# Altium PCB boost.PcbDoc
Units mm, origin at the board's own origin, x right, y up, seen from the top; angles counter-clockwise.
Board outline 50.04 x 50.04 mm, 2 copper layers (Top Layer, Bottom Layer); 27 components, 16 nets, 93 pads, 88 vias.
Unrouted connection lines stored in the file: 1.
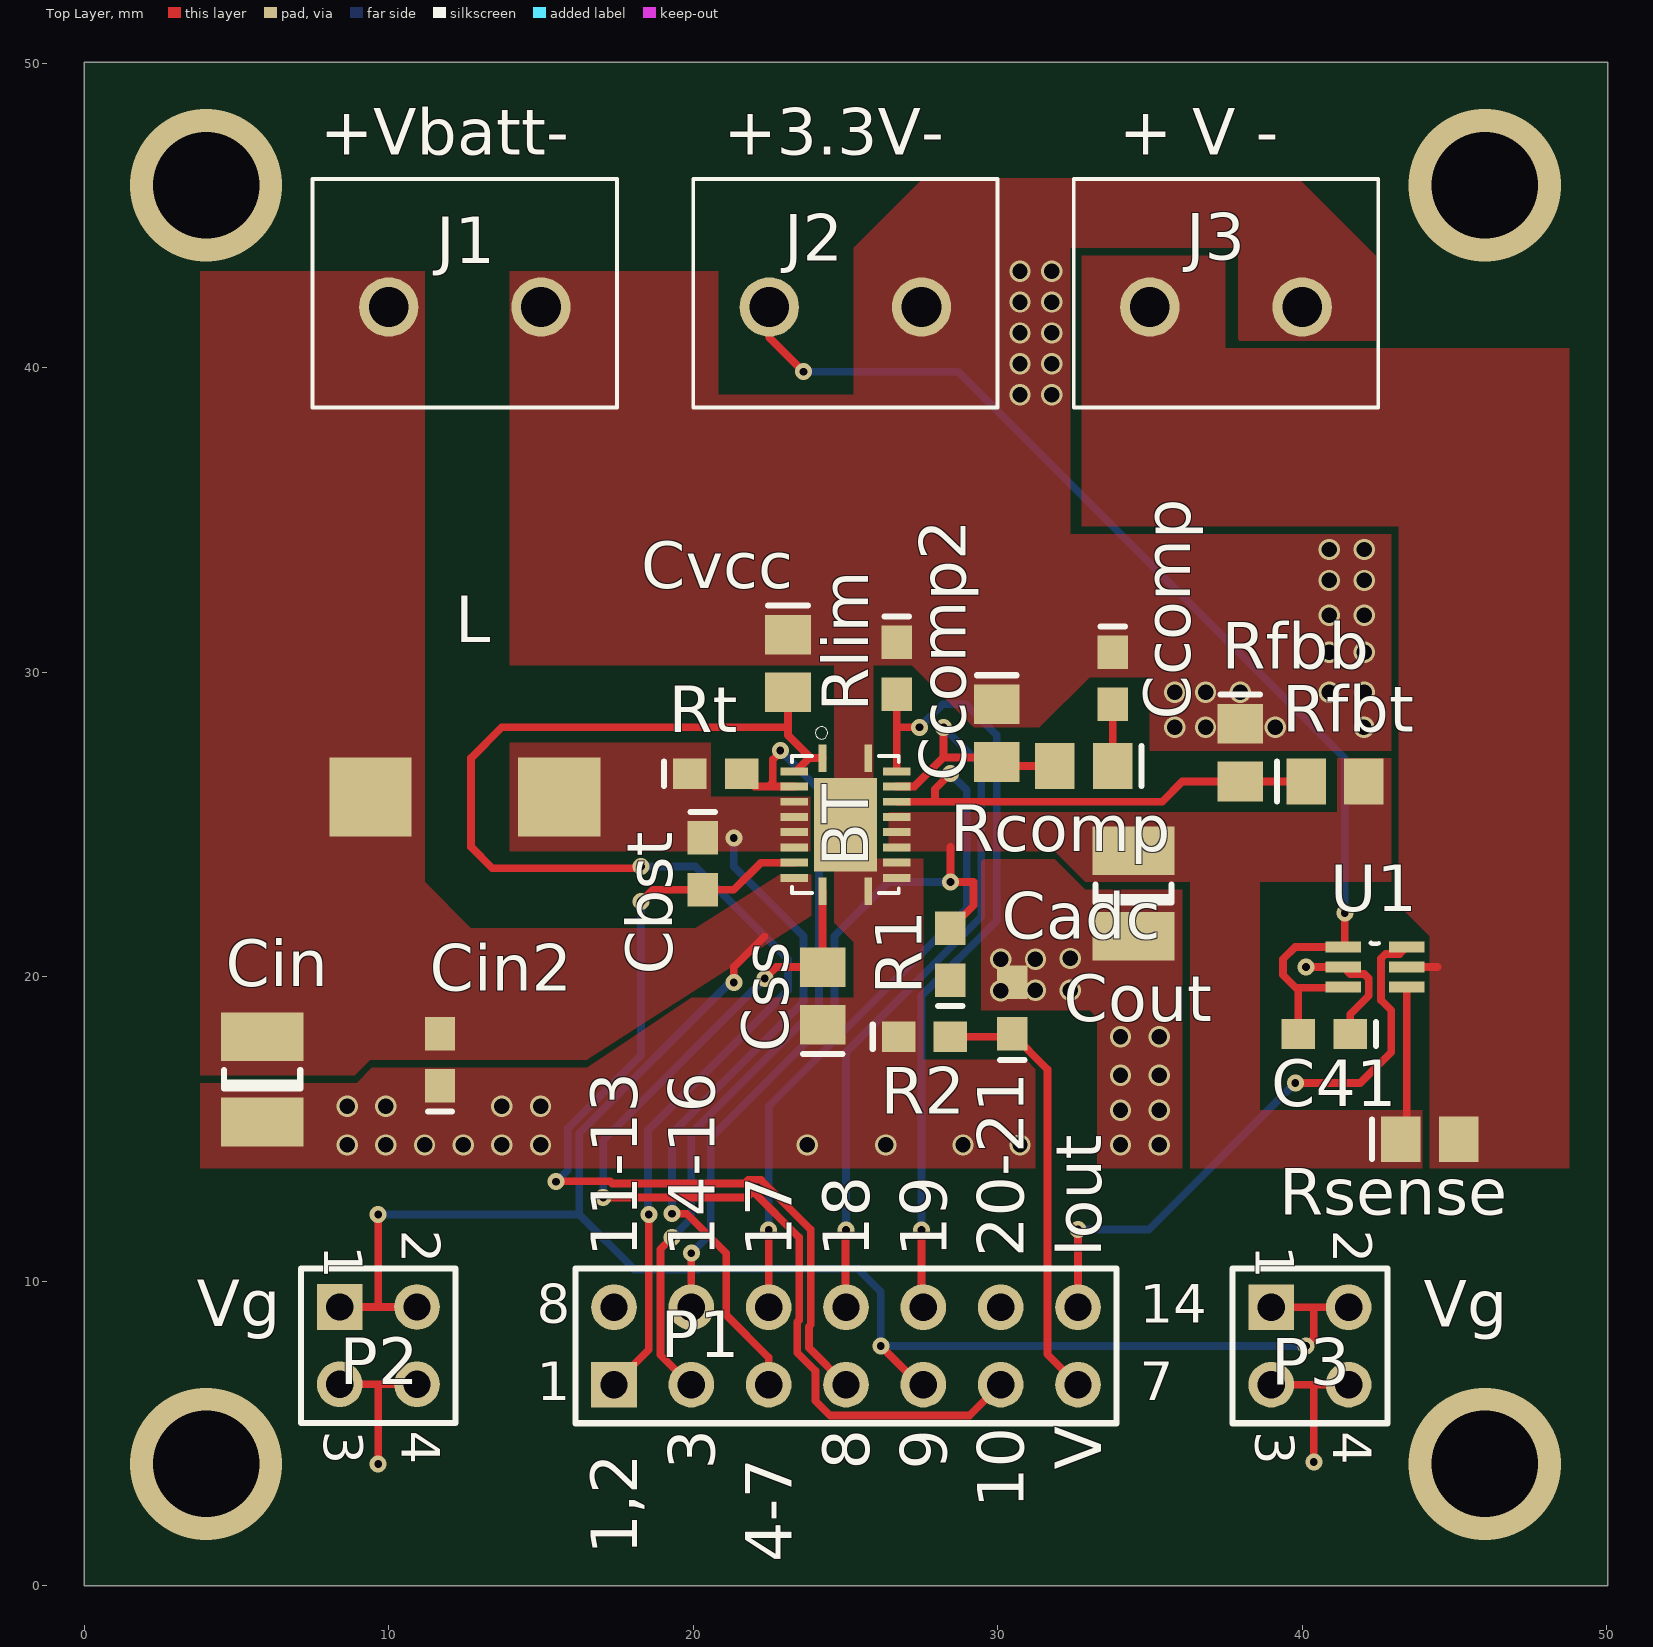
[diagram p0: Top Layer view]
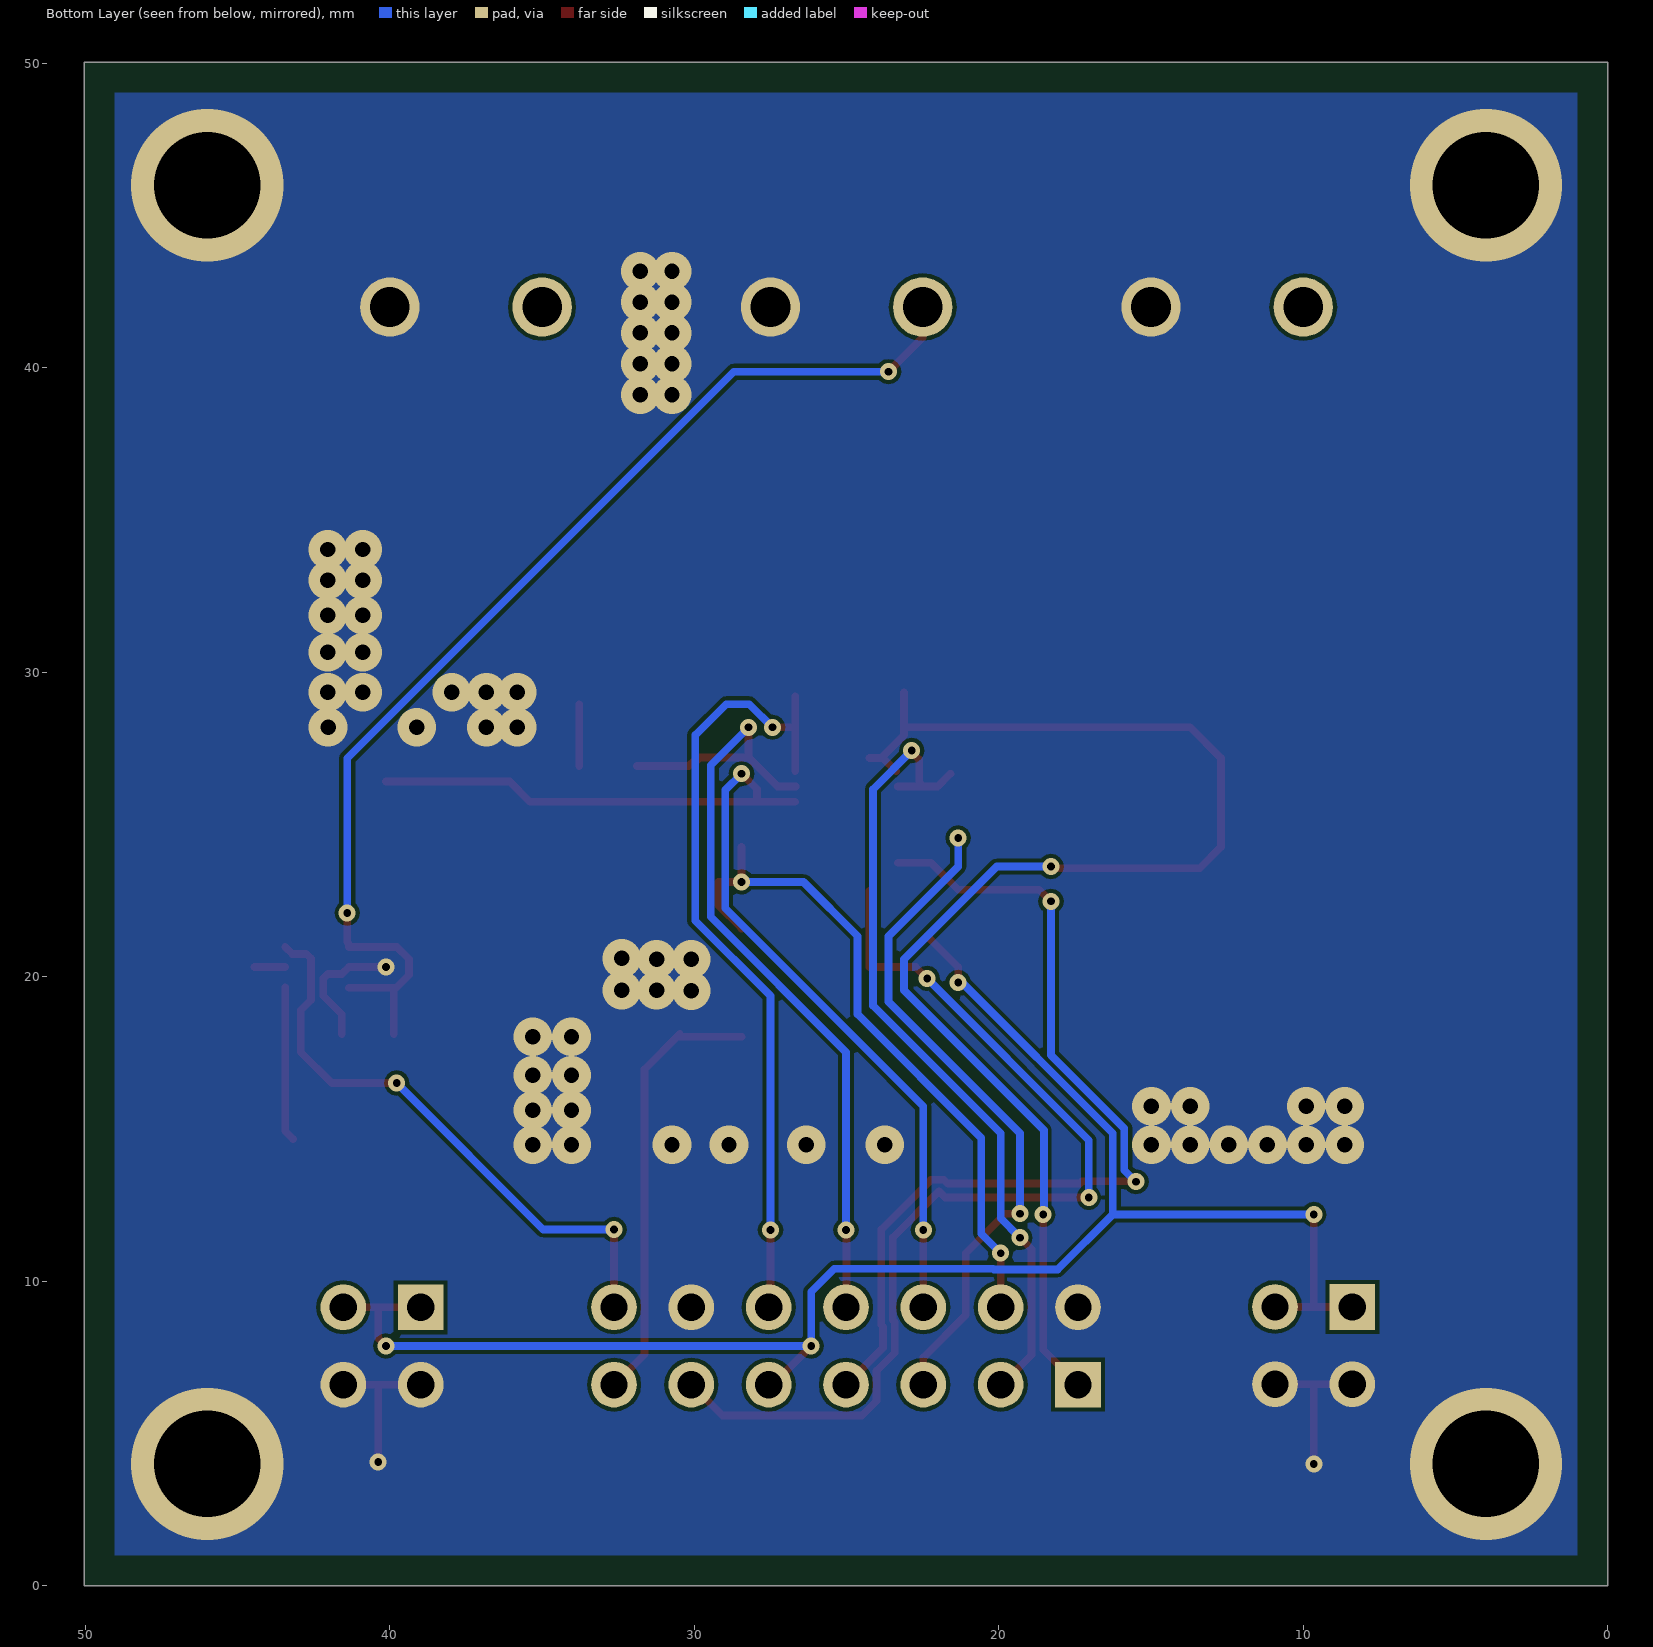
[diagram p1: Bottom Layer view, seen from below]

## Layer stack, top to bottom
Top Solder: solder mask 0.0102, Solder Resist, Dk 3.5
Top Layer: signal copper 0.0356
Dielectric 1: dielectric 0.32, FR-4, Dk 4.8
Bottom Layer: signal copper 0.0356
Bottom Solder: solder mask 0.0102, Solder Resist, Dk 3.5

## Board outline
0,0 0,50.038 50.038,50.038 50.038,0

## Design rules (kind name [scope] priority, off if disabled: settings)
AssemblyTestPointUsage [All] p1 off:
AssemblyTestpoint [All] p1 off: testpointundercomponent=TRUE minsize=1.016 maxsize=2.54 preferedsize=1.524 minholesize=0 maxholesize=1.016 preferedholesize=0.813 testpointgrid=0.025 usegrid=TRUE gridtolerance=0 allowsidetop=TRUE allowsidebottom=TRUE
Clearance [All] p1: gap=0.127 ignorepadtopadclearanceinfootprint=FALSE except(0: Arc-Hole Track-Hole SMDPad-Hole THPad-Hole Via-Hole Fill-Hole Poly-Hole Region-Hole Text-Hole)
FabricationTestPointUsage [All] p1 off: valid=0 allowmultiple=FALSE
FabricationTestpoint [All] p1 off: side=3 testpointundercomponent=FALSE minsize=1.016 maxsize=2.54 preferedsize=1.524 minholesize=0 maxholesize=1.016 preferedholesize=0.813 testpointgrid=0.025 allowsidetop=TRUE allowsidebottom=TRUE usegrid=TRUE gridtolerance=0
HoleSize [All] p1: absolutevalues=TRUE maxlimit=6.35 minlimit=0.203 maxpercent=80.000 minpercent=20.000
MinimumAnnularRing [All] p1: minimumring=0.127
MinimumSolderMaskSliver [All] p1: minsoldermaskwidth=0.102
PlaneConnect [All] p1: planeconnectstyle=Direct reliefexpansion=0.508 reliefentries=4 reliefconductorwidth=0.254 reliefairgap=0.254
PolygonConnect [All] p1: connectstyle=Direct reliefconductorwidth=0.254 reliefentries=4 polygonreliefangle="90 Angle" airgapwidth=0.254
RoutingVias [All] p1: holewidth=0.254 width=0.559 viastyle="Through Hole" minholewidth=0.254 minwidth=0.559 maxholewidth=12.7 maxwidth=12.7
SilkToSilkClearance [All] p1: silktosilkclearance=0
SilkToSolderMaskClearance [IsPad] p1: minsilkscreentomaskgap=0.076 clearancetoexposedcopper=TRUE
SolderMaskExpansion [All] p1: expansion=0.102
Width "Schematic Width Constraint" [InNet('Vout')] p1: maxlimit=2 minlimit=0.254 preferedwidth=2 minimp=50.000000 maximp=50.000000 favimp=50.000000
Width [All] p2: maxlimit=254 minlimit=0.152 preferedwidth=0.254
21 further rules are at their usual default settings.

## Classes and differential pairs
net class "5A Trace": Vadc

## Components (designator, comment, footprint, x,y, rotation, side; value= is the part's Value field where it differs from the comment)
BT "TPS61088" QFN50P450X350X100-21N 25,25 r0 top
C41 "Cap Semi" 0603 40.728,18.122 r180 top value=0.1uF
Cadc "" 0603 30.48,18.972 r90 top value=0.1µF
Cbst "" 0603 20.32,23.71 r270 top value=100nF
Ccomp "" 0603 33.782,29.806 r270 top value=470pF
Ccomp2 "" 0805 29.972,28.006 r270 top value=22pF
Cin "" 1210 5.842,16.634 r90 top value=47µF
Cin2 "" 0603 11.684,17.272 r90 top value=100nF
Cout "" 1210 34.462,22.736 r90 top value=100µF
Css "8.2nF" 0805 24.25,19.37 r90 top
Cvcc "" 0805 23.114,30.292 r270 top value=2.2µF
J1 "691102710002" 691102710002 12.5,42 r0 top
J2 "691102710002" 691102710002 25,42 r0 top
J3 "691102710002" 691102710002 37.5,42 r0 top
L "" 2-SMD 12.498,25.908 r0 top value=600nH
P1 "Header 7X2A" HDR2X7_CEN 17.399,6.604 r0 top
P2 "Header 2X2" HDR2X2 8.387,9.155 r270 top
P3 "Header 2X2" HDR2X2 38.989,9.144 r270 top
R1 "" 0603 28.448,20.74 r90 top value=100kO
R2 "" 0603 27.598,18.034 r0 top value=100kO
Rcomp "" 0805 32.832,26.924 r180 top value=44.2kO
Rfbb "" 0805 37.973,27.366 r270 top value=69.8kO
Rfbt "" 0805 41.082,26.416 r0 top value=220kO
Rlim "" 0603 26.685,30.138 r270 top value=105kO
Rsense "10mΩ 1/2W 0805" 0805 44.196,14.668 r0 top value=10mO
Rt "RtA1" 0603 20.74,26.67 r0 top value=267kO
U1 "INA214" SOT65P210X110-6N 42.393,20.32 r0 top

## Footprints (in the part's own frame and the unit in brackets; to place one, negate y for a bottom-side part, rotate by r counter-clockwise, add the part's x,y. Pads: shape width x height; smd on the part's side, far side on the other; paste and mask are expansions set on the pad)
2-SMD [mm]
  rect 2.7x2.6 smd: 1(-3.1,0) 2(3.1,0)
0603 [mm] "Chip Capacitor; Body 1.6 x 0.8 mm (LxW typ)"
  rect 1.1x1 smd: 1(-0.85,0) 2(0.85,0)
  silkscreen extent -1.7,-0.4 -1.7,0.4
0805 [mm] "Chip Capacitor; Body 2.0 x 1.2 mm (LxW typ)"
  rect 1.3x1.5 smd: 1(-0.95,0) 2(0.95,0)
  silkscreen extent -1.9,-0.65 -1.9,0.65
1210 [mm] "Chip Capacitor; Body 3.2 x 2.5 mm (LxW typ)"
  rect 1.6x2.7 smd: 1(-1.4,0) 2(1.4,0)
  silkscreen extent -0.3,-1.25 0.3,1.25
691102710002 [mm]
  round 1.95 hole 1.3: 1(-2.5,0) 2(2.5,0)
  silkscreen extent -5,-3.3 5,4.2
HDR2X2 [mm] "Connector; Header; 2x2 Position"
  rect 1.5x1.5 hole 0.9: 1(0,0)
  round 1.5 hole 0.9: 2(0,2.54) 3(2.54,0) 4(2.54,2.54)
  silkscreen extent -1.27,-1.27 3.81,3.81
HDR2X7_CEN [mm] "Connector; Header; 7x2 Position"
  rect 1.5x1.5 hole 0.9: 1(0,0)
  round 1.5 hole 0.9: 2(2.54,0) 3(5.08,0) 4(7.62,0) 5(10.16,0) 6(12.7,0) 7(15.24,0) 8(0,2.54) 9(2.54,2.54) 10(5.08,2.54) 11(7.62,2.54) 12(10.16,2.54) 13(12.7,2.54) 14(15.24,2.54)
  silkscreen extent -1.27,-1.27 16.51,3.81
QFN50P450X350X100-21N [mm]
  rect 0.26x0.9 smd: 1(-0.75,2.185) 10(-0.75,-2.185) 11(0.75,-2.185) 20(0.75,2.185)
  rect 0.9x0.26 smd: 2(-1.685,1.75) 3(-1.685,1.25) 4(-1.685,0.75) 5(-1.685,0.25) 6(-1.685,-0.25) 7(-1.685,-0.75) 8(-1.685,-1.25) 9(-1.685,-1.75) 12(1.685,-1.75) 13(1.685,-1.25) 14(1.685,-0.75) 15(1.685,-0.25) 16(1.685,0.25) 17(1.685,0.75) 18(1.685,1.25) 19(1.685,1.75)
  rect 2.07x3.07 smd: 21(0,0)
  silkscreen extent -1.75,-2.25 1.75,3.21
SOT65P210X110-6N [mil]
  rect 46x14 smd: 1(-41,26) 2(-41,0) 3(-41,-26) 4(41,-26) 5(41,0) 6(41,26)
  silkscreen extent -5,30 5,31

## Part data
BT: "Boost converter"
C41: "Capacitor (Semiconductor SIM Model)", LatestRevisionDate=29-May-2009, LatestRevisionNote="IPC-7351 Footprint Added.", PackageDescription="Chip Capacitor", PackageReference=C1206, Published=8-Jun-2000, Publisher="Altium Limited"
Cadc Cbst Ccomp Ccomp2 Cin Cin2 Cout Css Cvcc: library part Cap, "Capacitor", LatestRevisionDate=17-Jul-2002, LatestRevisionNote="Re-released for DXP Platform.", PackageDescription="Radial Cap, Thru-Hole; 2 Leads; 0.3 in Pin Spacing", PackageReference=RAD-0.3, Published=8-Jun-2000, Publisher="Altium Limited"
J1 J2 J3: "102 Series 5mm Pitch Straight, PCB Terminal Block, Through Hole, 2 Way", Package=None, Availability=Unavailable, MF="Wurth Electronics", MP=691102710002, Price=None, SnapEDA_Link=https://www.snapeda.com/parts/691102710002/Wurth%20Electronics%20Inc/view-part/?ref=snap
L: library part Inductor, "Inductor", Code_IEC=1005, Code_JEITA=0402, LatestRevisionDate=29-May-2009, LatestRevisionNote="IPC-7351 Footprint Added.", PackageDescription="Chip Inductor", PackageReference=0402-A, Published=8-Jun-2000, Publisher="Altium Limited"
P1: "Header, 7-Pin, Dual row", LatestRevisionDate=17-Jul-2002, LatestRevisionNote="Re-released for DXP Platform.", Publisher="Altium Limited"
P2 P3: "Header, 2-Pin, Dual row", LatestRevisionDate=17-Jul-2002, LatestRevisionNote="Re-released for DXP Platform.", Publisher="Altium Limited"
R1 R2 Rcomp Rfbb Rfbt Rlim Rsense Rt: library part Res2, "Resistor", LatestRevisionDate=17-Jul-2002, LatestRevisionNote="Re-released for DXP Platform.", PackageDescription="Axial Device, Thru-Hole; 2 Leads; 0.4 in Pin Spacing", PackageReference=AXIAL-0.4, Published=8-Jun-2000, Publisher="Altium Limited"
U1: "Current monitor", Supplier Part Number 1=296-38956-6-ND, Supplier 1=Digi-Key

## Via types
v1: diameter 0.7/1.27 (per signal layer), hole 0.508, Top Layer to Bottom Layer, 55 vias
v2: diameter 0.559, hole 0.254, Top Layer to Bottom Layer, 29 vias
v3: diameter 5/5 (per signal layer), hole 3.5, Top Layer to Bottom Layer, 4 vias

## Nets (pads, with @x,y where several pads share a name; then routed paths per layer and width w, separated by ;. In a path a pad name is that pad's centre, name@x,y a point inside that pad or via, vN(x,y) a via of type N, cw(c..) or ccw(c..) an arc to the next point about the centre after c; other vN are vias at no path point)
+3V3: C41.2 J2.1 U1.1 U1.3 | length 38.1
  Top Layer w0.254: J2.1 22.5,41 v2(23.622,39.878) ; C41.2 39.878,19.558 39.796,19.64 ; U1.3@41.351,19.64 39.796,19.64 ; U1.1 39.776,20.98 39.37,20.574 39.37,20.066 39.796,19.64 ; U1.1@41.351,21.082 41.402,21.133 v2(41.402,22.098)
  Bottom Layer w0.254: v2(23.622,39.878) 28.702,39.878 41.402,27.178 v2(41.402,22.098)
+5V: J3.1 Rsense.2 U1.5 | length 1
  Top Layer w0.254: U1.5 44.45,20.32
AGND: BT.11 BT.12 BT.13 BT.20 BT.21 C41.1 Cadc.2 Ccomp2.1 Ccomp.1 Cin2.1 Cin.1 Cout.1 Css.1 Cvcc.1 J1.2 J2.2 J3.2 P1.8 P1.13 P2.3 P2.4 P3.3 P3.4 R2.1 Rfbb.1 Rlim.1 U1.2 | length 14.5
  Top Layer w0.254: P2.3 9.652,6.615 ; v2(9.652,4) 9.652,6.615 ; P2.4@10.927,6.604 10.917,6.615 9.652,6.615 ; P3.3 40.386,6.604 ; v2(40.132,20.32) U1.2 41.578,20.093 41.578,20.091 42.041,20.091 42.189,19.943 42.189,19.377 41.578,18.765 C41.1 ; v2(40.386,4.064) 40.386,6.604 ; P3.4 40.386,6.604
  other v1: 8.636,14.478 9.906,14.478 11.176,14.478 12.446,14.478 13.709,14.478 14.986,14.478 23.744,14.478 26.321,14.478 28.862,14.478 30.734,14.478 34.036,14.478 35.306,14.478 34.036,15.621 35.306,15.621 8.636,15.748 9.906,15.748 13.716,15.748 14.986,15.748 34.036,16.764 35.306,16.764 34.036,18.034 35.306,18.034 30.099,19.543 31.242,19.558 32.384,19.558 30.099,20.574 31.242,20.574 32.384,20.603 35.814,28.194 36.83,28.194 39.116,28.194 42.032,28.194 35.814,29.342 36.83,29.342 37.973,29.342 40.894,29.342 42.041,29.342 40.894,30.656 42.041,30.656 40.894,31.877 42.041,31.877 40.894,33.02 42.041,33.02 40.894,34.036 42.041,34.036 30.734,39.116 31.781,39.116 30.734,40.132 31.781,40.132 30.734,41.148 31.781,41.148 30.734,42.164 31.781,42.164 30.734,43.18 31.781,43.18
  other v3: 4,4 46,4 4,46 46,46
BOOT: BT.8 Cbst.2 P1.4 | length 30.7
  Top Layer w0.254: v2(15.494,13.27) 15.494,13.208 15.57,13.284 17.264,13.284 17.341,13.208 21.679,13.208 21.806,13.335 22.225,13.335 23.864,11.696 23.864,8.57 23.803,8.509 23.803,7.812 P1.4@25,6.615 ; v2(18.288,22.479) 18.669,22.86 Cbst.2 21.336,22.86 22.226,23.75 BT.8
  Bottom Layer w0.254: v2(15.494,13.27) 15.875,13.651 15.875,15.017 18.288,17.43 v2(18.288,22.479)
COMP: BT.18 Ccomp2.2 P1.11 Rcomp.2 | length 28.1
  Top Layer w0.254: P1.11@25,9.155 25,11.665 v2(25.019,11.684) ; BT.18@26.67,26.25 BT.18 27.266,26.25 28.219,27.203 ; v2(28.219,28.194) 28.219,27.203 ; Ccomp2.2 29.825,27.203 28.219,27.203 ; Ccomp2.2@29.972,27.134 30.182,26.924 Rcomp.2
  Bottom Layer w0.254: v2(25.019,11.684) 25.019,17.526 29.464,21.971 29.464,26.949 v2(28.219,28.194)
FB: BT.17 P1.10 Rfbb.2 Rfbt.1 | length 35.3
  Top Layer w0.254: P1.10 v2(22.479,11.684) ; BT.17 27.94,25.75 ; v2(28.448,26.67) 27.94,26.162 27.94,25.75 ; Rfbt.1 36.068,26.416 35.402,25.75 27.94,25.75
  Bottom Layer w0.254: v2(22.479,11.684) 22.479,15.748 28.981,22.25 28.981,23.335 ; v2(28.448,26.67) 28.981,26.137 28.981,23.368
FSW: BT.3 P1.2 Rt.2 | length 27.1
  Top Layer w0.254: v2(19.304,11.43) 18.923,11.049 18.923,7.582 P1.2@19.89,6.615 ; Rt.2 22.01,26.25 22.479,26.25 ; v2(22.86,27.432) 22.86,27.383 22.611,27.134 22.611,26.382 22.479,26.25 ; BT.3 22.479,26.25
  Bottom Layer w0.254: v2(19.304,11.43) 19.939,12.065 19.939,14.859 24.13,19.05 24.13,26.162 v2(22.86,27.432)
Iadc: P1.14 U1.6 | length 19.5
  Top Layer w0.254: P1.14 v2(32.639,11.696) ; v2(39.776,16.51) 41.91,16.51 42.926,17.526 42.926,18.898 42.596,19.228 42.596,20.603 42.745,20.752 43.205,20.752 U1.6
  Bottom Layer w0.254: v2(32.639,11.696) 34.962,11.696 v2(39.776,16.51)
ILIM: BT.19 P1.12 Rlim.2 | length 26.3
  Top Layer w0.254: BT.19 26.685,28.194 ; Rlim.2@26.685,29.21 26.685,28.194 ; v2(27.432,28.194) 26.685,28.194 ; v2(27.5,11.684) 27.5,9.214 P1.12@27.559,9.155
  Bottom Layer w0.254: v2(27.432,28.194) 28.194,28.956 28.956,28.956 29.972,27.94 29.972,21.844 27.5,19.372 v2(27.5,11.684)
NetCcomp_2: Ccomp.2 Rcomp.1 | length 2
  Top Layer w0.254: Rcomp.1 Ccomp.2
SS: BT.10 Css.2 P1.6 | length 33.4
  Top Layer w0.254: v2(17.043,12.751) 21.76,12.751 21.963,12.954 23.483,11.434 23.483,8.728 23.422,8.667 23.422,7.654 24.015,7.061 24.015,6.073 24.5,5.588 29.072,5.588 P1.6@30.099,6.615 ; v2(22.352,19.943) 22.729,20.32 Css.2 BT.10
  Bottom Layer w0.254: v2(17.043,12.751) 17.043,14.634 v2(22.352,19.943)
SW: BT.4 BT.5 BT.6 BT.7 Cbst.1 L.2 P1.3 Rt.1 | length 22.3
  Top Layer w0.254: v2(19.304,12.217) 19.787,12.217 21.082,10.922 21.082,8.89 22.479,7.493 P1.3
  Bottom Layer w0.254: v2(19.304,12.217) 19.304,14.859 23.622,19.177 23.622,21.336 21.336,23.622 v2(21.336,24.56)
Vadc: Cadc.1 P1.7 R1.1 R2.2 | length 14.4
  Top Layer w0.254: R2.2 Cadc.1@30.48,18.034 ; Cadc.1 31.635,16.967 31.635,7.608 P1.7
Vcc: BT.1 BT.2 Cvcc.2 P1.1 | length 45.6
  Top Layer w0.254: P1.1 18.542,7.747 v2(18.542,12.192) ; v2(18.288,23.622) 18.229,23.563 13.403,23.563 12.7,24.267 12.7,27.185 13.709,28.194 23.114,28.194 ; Cvcc.2 23.114,28.194 ; BT.2@23.368,26.75 23.803,27.185 ; BT.1 23.803,27.185 ; 23.114,28.194 23.114,27.932 23.803,27.243 23.803,27.185
  Bottom Layer w0.254: v2(18.288,23.622) 20.066,23.622 23.114,20.574 23.114,19.558 18.517,14.961 18.517,12.217 v2(18.542,12.192)
Vin: BT.9 Cin2.2 Cin.2 J1.1 L.1 P1.5 P2.1 P2.2 P3.1 P3.2 | length 56.5
  Top Layer w0.254: P2.1 9.652,9.155 ; v2(9.652,12.192) 9.652,9.155 ; P2.2@10.927,9.144 10.917,9.155 9.652,9.155 ; v2(21.336,19.812) 21.336,20.32 22.352,21.336 ; v2(26.162,7.874) 27.432,6.604 P1.5 ; P3.1 40.386,9.144 ; v2(40.132,7.874) 40.386,8.128 40.386,9.144 ; P3.2@41.578,9.155 41.567,9.144 P3.2 40.386,9.144
  Bottom Layer w0.254: v2(9.652,12.192) 15.215,12.192 16.256,12.192 ; v2(21.336,19.812) 21.209,19.812 16.256,14.859 16.256,12.192 ; v2(40.132,7.874) v2(26.162,7.874) 26.162,9.652 25.4,10.414 20.185,10.414 20.16,10.389 18.059,10.389 16.256,12.192
Vout: BT.14 BT.15 BT.16 Cout.2 P1.9 R1.2 Rfbt.2 Rsense.1 U1.4 | length 27.5
  Top Layer w0.254: P1.9 v2(19.939,10.922) ; R1.2 29.21,22.352 29.21,23.114 v2(28.448,23.114) 28.448,24.267 ; Rsense.1@43.18,14.668 43.434,14.922 U1.4
  Bottom Layer w0.254: v2(19.939,10.922) 20.574,11.557 20.574,14.707 24.638,18.771 24.638,21.336 26.416,23.114 v2(28.448,23.114)

## Polygon pours and split planes (outlines as drawn)
SW on Top Layer "SW" (solid, pour order 8): 13.97,24.13 13.97,27.686 20.574,27.686 20.574,25.908 23.876,25.908 23.876,24.13
AGND on Top Layer "AGND" (solid, pour order 40): 13.97,34.29 13.97,43.18 20.828,43.18 20.828,39.116 25.273,39.116 25.273,43.942 27.559,46.228 39.878,46.228 42.418,43.688 42.418,40.894 37.846,40.894 37.906,40.954 37.906,43.942 32.384,43.942 32.384,34.29
AGND on Top Layer "AGND" (solid, pour order 38): 42.926,29.972 42.926,27.432 35,27.432 35,29.972
AGND on Top Layer "AGND" (solid, pour order 36): 29.464,18.898 33.02,18.898 33.274,18.644 33.274,13.716 36.068,13.716 36.068,22.86 32.886,22.86 31.882,23.864 29.464,23.876
AGND on Top Layer "AGND" (solid, pour order 34): 3.81,16.51 8.941,16.51 9.449,17.018 16.51,17.018 18.034,18.034 19.939,19.304 20.574,19.304 25.273,19.304 25.273,21.133 24.638,21.768 24.638,23.876 27.559,23.876 27.559,17.272 30.937,17.272 31.242,16.967 31.242,13.716 3.81,13.716
Vout on Top Layer "Vout" (solid, pour order 30): 43.942,15.621 43.942,13.716 36.322,13.716 36.322,23.435 36.352,23.465 38.608,23.465 38.608,15.621
+5V on Top Layer "+5V" (solid, pour order 28): 43.18,23.25 43.18,22.352 44.196,21.336 44.196,19.304 44.196,13.716 48.768,13.716 48.768,23.25
+5V on Top Layer "+5V" (solid, pour order 26): 32.766,43.688 32.766,34.798 43.18,34.798 43.18,23.114 48.768,23.114 48.768,40.64 37.48,40.64 37.48,43.688
AGND on Top Layer "AGND" (solid, pour order 22): 24.638,26.416 25.908,26.416 25.908,30.48 24.638,30.48
AGND on Top Layer "AGND" (solid, pour order 20): 31.369,28.194 33.02,29.845 42.926,29.845 42.926,34.544 13.97,34.544 13.97,30.226 27.178,30.226 29.21,28.194
Vout on Top Layer "Vout" (solid, pour order 18): 32.886,23.114 31.615,24.384 42.926,24.384 42.926,23.114
Vout on Top Layer "Vout" (solid, pour order 16): 42.926,27.178 42.926,25.146 41.148,25.146 41.148,27.178
Vout on Top Layer "Vout" (solid, pour order 14): 26.416,25.4 26.416,24.13 42.926,24.13 42.926,25.4
Vin on Top Layer "Vin" (solid, pour order 12): 23.876,23.368 23.876,22.007 16.51,17.272 12.446,17.272 12.446,21.59 20.066,21.59 22.86,23.368
Vin on Top Layer "Vin" (solid, pour order 10): 3.81,16.764 8.89,16.764 9.398,17.272 12.7,17.272 12.7,21.59 11.176,23.114 11.176,43.18 8.89,43.18 3.81,43.18 3.81,35.814 3.81,21.59
AGND on Bottom Layer "GND" (solid, pour order 4): 1,49.038 1,1 49.038,1 49.038,49.038

## Silkscreen, mask and mechanical layers (free items; w line width, h text height)
Top Overlay:
  text "+Vbatt-" at 7.747,47 h1.52
  text "+3.3V-" at 21,47 h1.52
  text "+ V -" at 34,47 h1.52
  text "11-13" at 18.161,10.795 h1.52 r90
  text "14-16" at 20.701,10.795 h1.52 r90
  text "17" at 23.241,10.795 h1.52 r90
  text "18" at 25.781,10.795 h1.52 r90
  text "19" at 28.321,10.795 h1.52 r90
  text "20-21" at 30.861,10.795 h1.52 r90
  text "Iout" at 33.401,10.795 h1.52 r90
  text "Vg" at 3.688,8.52 h1.52
  text "Vg" at 44,8.5 h1.52
  text "3" at 20.701,3.81 h1.52 r90
  text "8" at 25.781,3.81 h1.52 r90
  text "9" at 28.321,3.81 h1.52 r90
  text "V" at 33.401,3.81 h1.52 r90
  text "10" at 30.861,2.54 h1.52 r90
  text "1,2" at 18.161,1.016 h1.52 r90
  text "4-7" at 23.241,0.762 h1.52 r90

## Text inside footprints (layer, text, board x,y; h text height)
J1: Mechanical 1 "1" at 8.844,39.346 h1.88
J2: Mechanical 1 "1" at 21.344,39.346 h1.88
J3: Mechanical 1 "1" at 33.844,39.346 h1.88
P1: Top Overlay "8" at 14.859,8.636 h1.27; Top Overlay "1" at 14.859,6.096 h1.27; Top Overlay "7" at 34.671,6.096 h1.27; Top Overlay "14" at 34.671,8.636 h1.27
P2: Top Overlay "1" at 7.879,11.187 h1.27 r270; Top Overlay "2" at 10.419,11.695 h1.27 r270; Top Overlay "4" at 10.419,5.091 h1.27 r270; Top Overlay "3" at 7.879,5.091 h1.27 r270
P3: Top Overlay "1" at 38.481,11.176 h1.27 r270; Top Overlay "2" at 41.021,11.684 h1.27 r270; Top Overlay "4" at 41.021,5.08 h1.27 r270; Top Overlay "3" at 38.481,5.08 h1.27 r270